# Altium PCB PCB1.pcbdoc
Units mil, origin at the board's own origin, x right, y up, seen from the top; angles counter-clockwise.
Board outline 4640 x 5555.46 mil, 2 copper layers (Top Layer, Bottom Layer); 7 components, 13 nets, 82 pads, 1 vias.
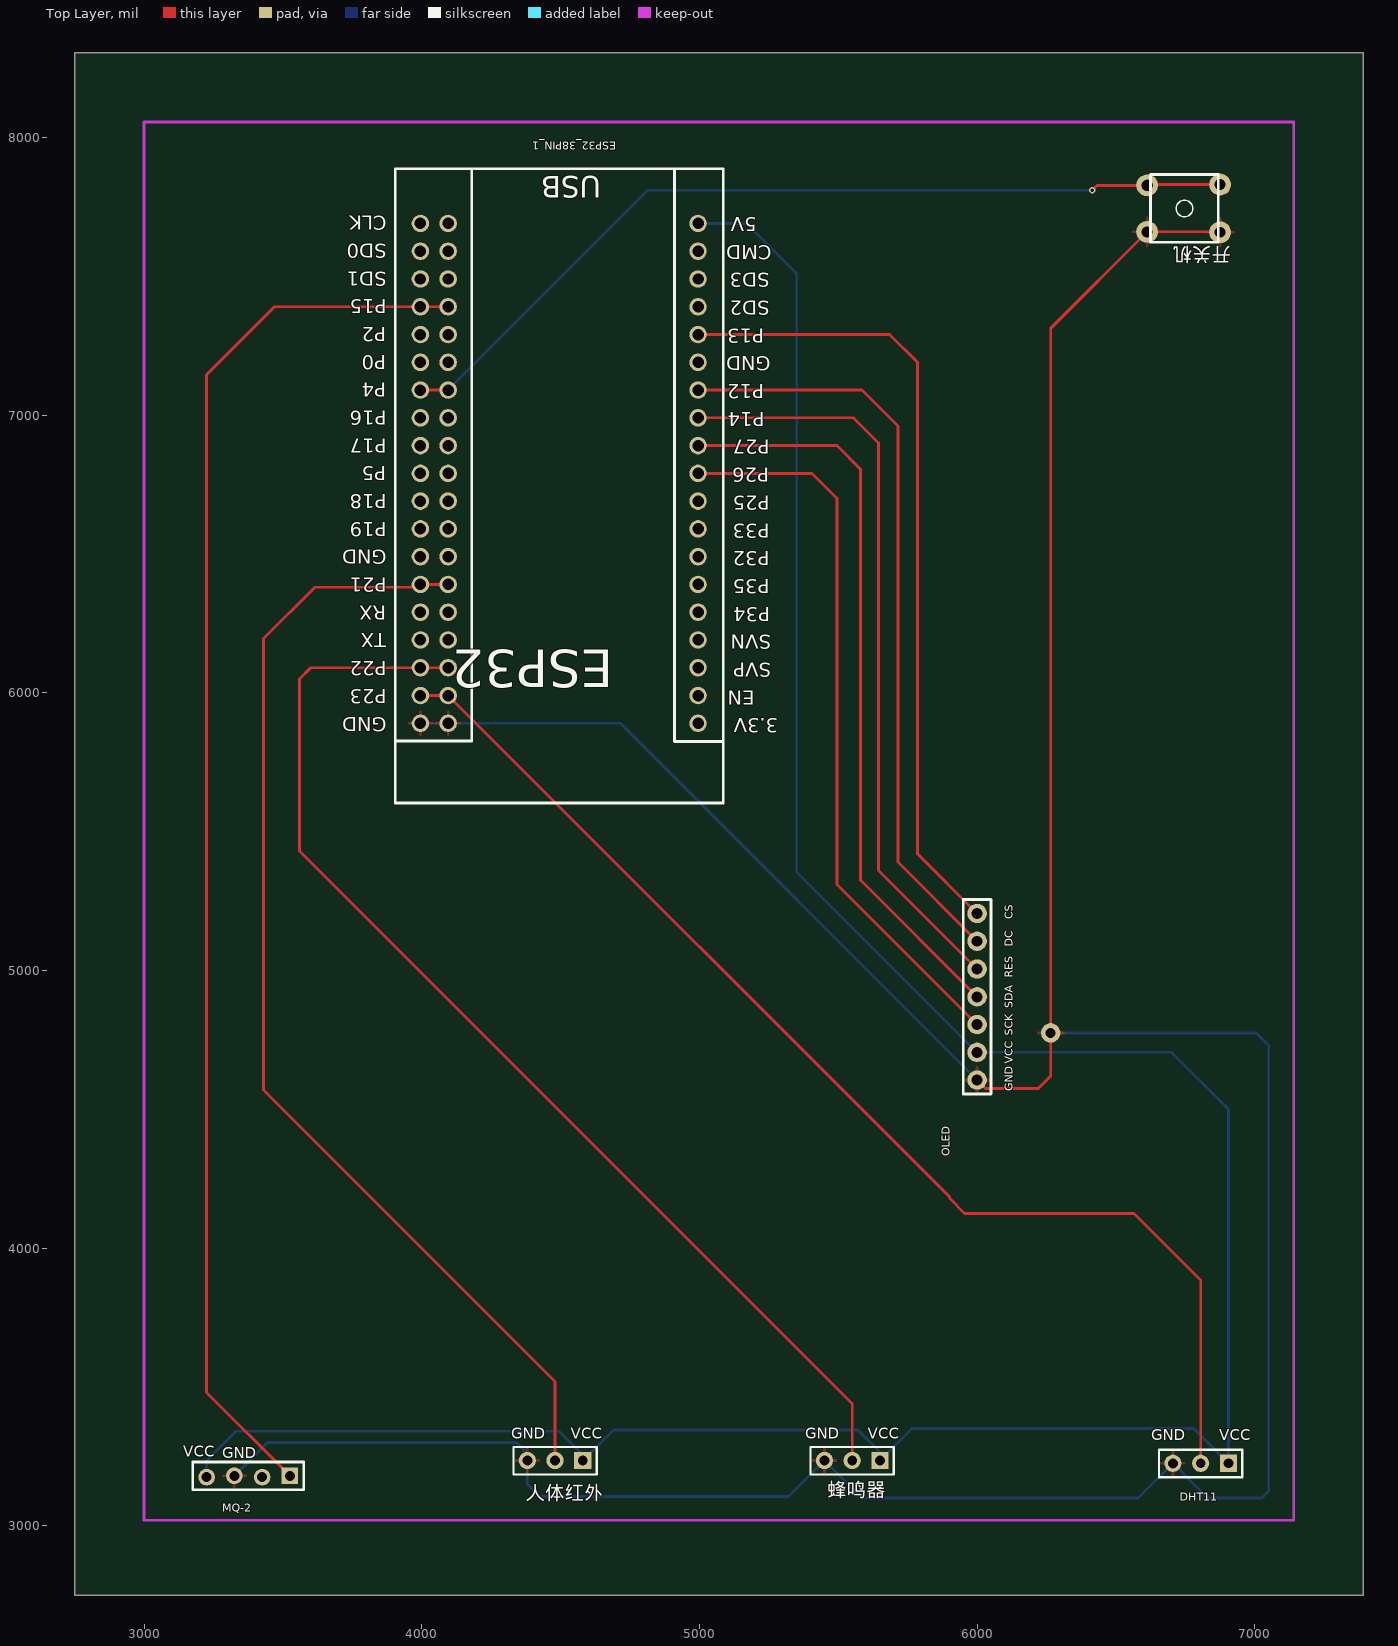
[diagram p0: Top Layer view]
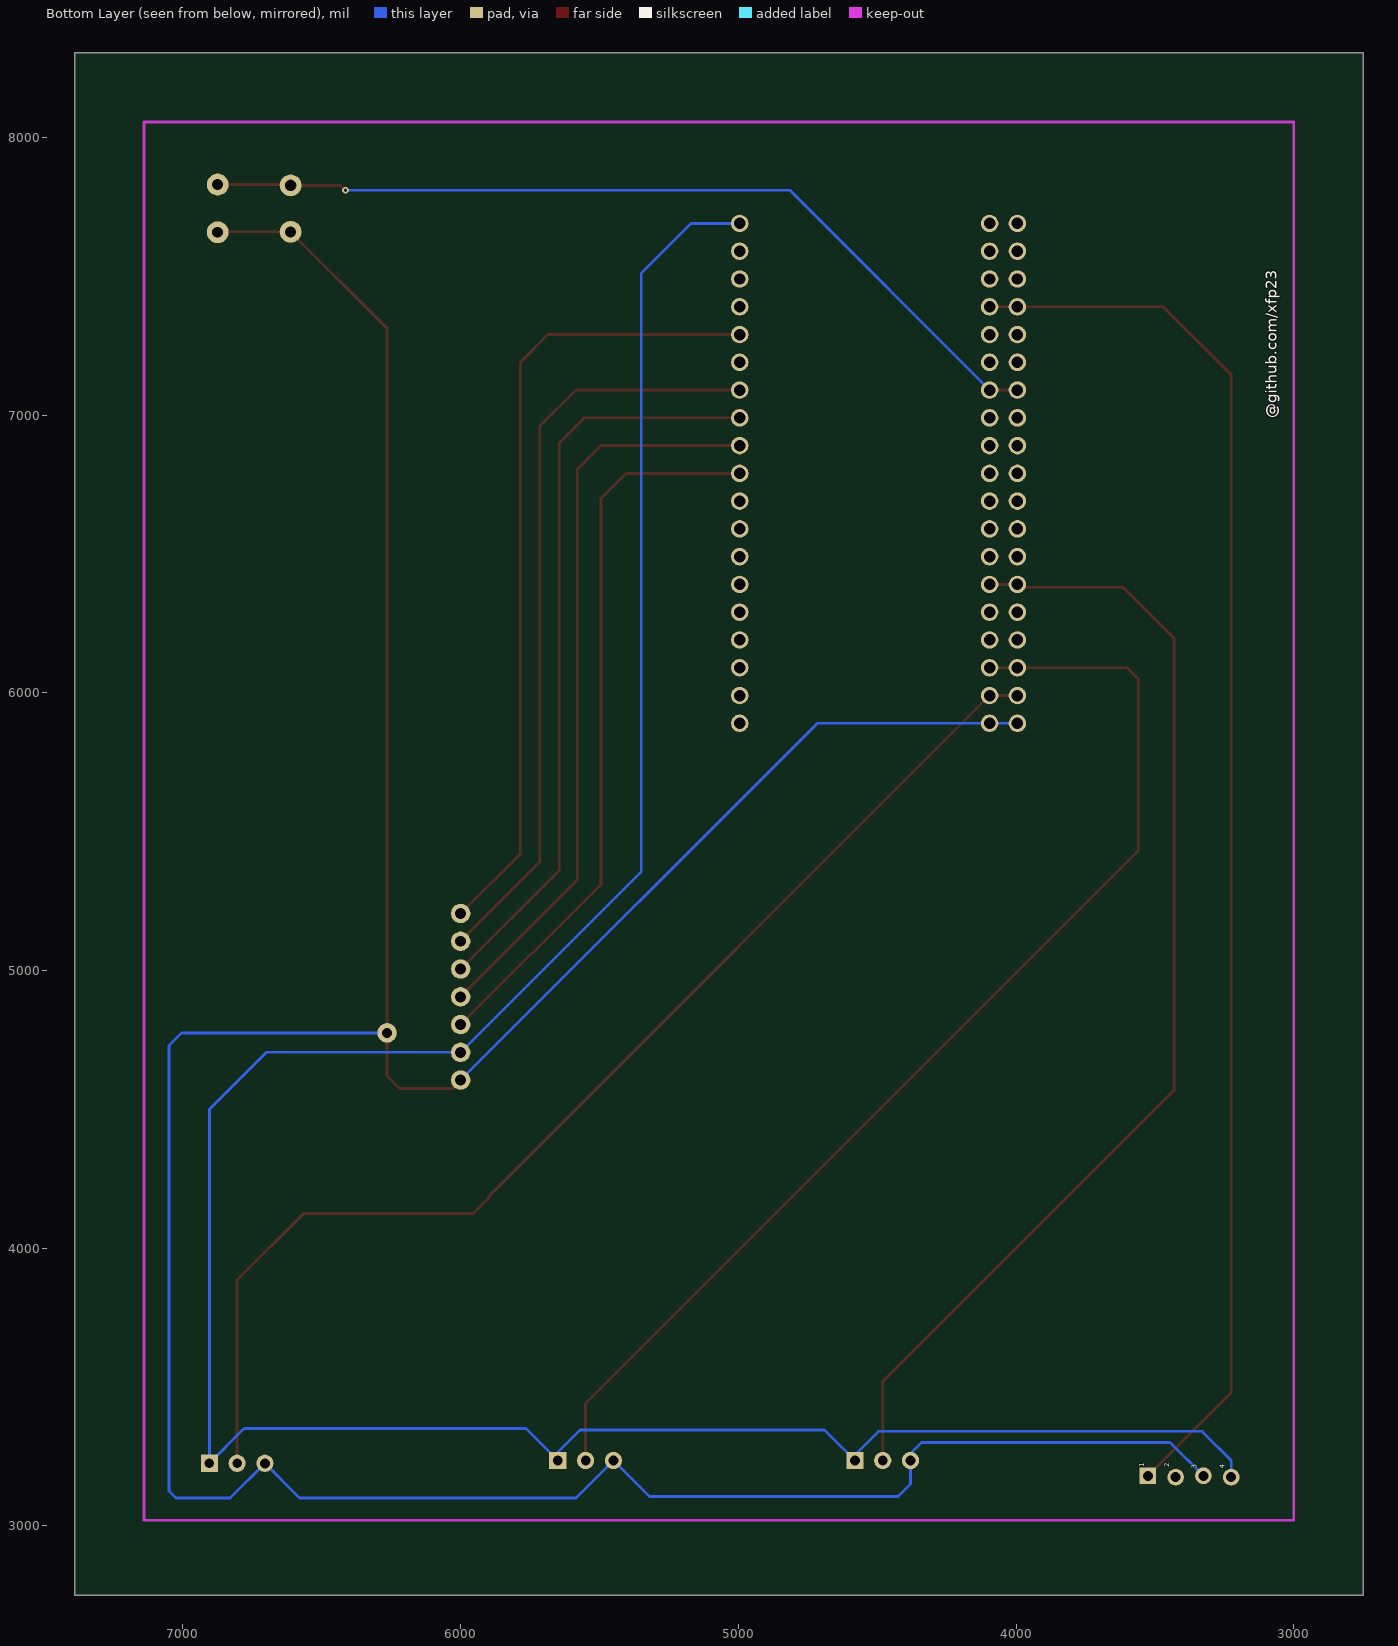
[diagram p1: Bottom Layer view, seen from below]

## Layer stack, top to bottom
Top Layer: signal copper (thickness not stored)
Dielectric: dielectric 12.6, FR-4, Dk 4.8
Bottom Layer: signal copper (thickness not stored)

## Board outline
7390,2750 2750,2750 2750,8305.46 7390,8305.46

## Design rules (kind name [scope] priority, off if disabled: settings)
Clearance copperThickness1oz [All] p1: gap=7 ignorepadtopadclearanceinfootprint=FALSE except(4: Track-Track; 6: Track-SMDPad SMDPad-SMDPad Track-THPad SMDPad-THPad THPad-THPad Track-Via SMDPad-Via THPad-Via Via-Via SMDPad-Fill THPad-Fill Via-Fill Fill-Fill Track-Region SMDPad-Region THPad-Region Via-Region Region-Region Track-Poly SMDPad-Poly THPad-Poly Via-Poly Fill-Poly Region-Poly Poly-Poly Track-Text SMDPad-Text THPad-Text Via-Text Fill-Text Region-Text Poly-Text Text-Text; 6.9: Track-Hole SMDPad-Hole THPad-Hole Via-Hole Fill-Hole Region-Hole Poly-Hole Text-Hole Sheet-Hole; 11.8: Track-Fill Fill-Region Track-Sheet SMDPad-Sheet THPad-Sheet Via-Sheet Fill-Sheet Region-Sheet Poly-Sheet Text-Sheet)
Clearance copperThickness2oz [All] p1: gap=7 ignorepadtopadclearanceinfootprint=FALSE except(6: Track-SMDPad SMDPad-SMDPad Track-THPad SMDPad-THPad THPad-THPad Track-Via SMDPad-Via THPad-Via Via-Via SMDPad-Fill THPad-Fill Via-Fill Fill-Fill Track-Region SMDPad-Region THPad-Region Via-Region Region-Region Track-Poly SMDPad-Poly THPad-Poly Via-Poly Fill-Poly Region-Poly Poly-Poly Track-Text SMDPad-Text THPad-Text Via-Text Fill-Text Region-Text Poly-Text Text-Text; 6.9: Track-Hole SMDPad-Hole THPad-Hole Via-Hole Fill-Hole Region-Hole Poly-Hole Text-Hole Sheet-Hole; 8: Track-Track; 11.8: Track-Fill Fill-Region Track-Sheet SMDPad-Sheet THPad-Sheet Via-Sheet Fill-Sheet Region-Sheet Poly-Sheet Text-Sheet)
DiffPairsRouting differentialPair [All] p1: maxuncoupledlength=10 maxlimit=6 mostfreqgap=6 toplayer_minwidth=5 toplayer_prefwidth=10 toplayer_maxwidth=100 bottomlayer_minwidth=5 bottomlayer_prefwidth=10 bottomlayer_maxwidth=100
PasteMaskExpansion pasteMaskExpansion [All] p1:
PlaneConnect innerPlane [All] p1: planeconnectstyle=Relief reliefexpansion=20 reliefentries=4 reliefconductorwidth=10 reliefairgap=10
PolygonConnect copperRegion [All] p1: connectstyle=Relief reliefentries=4 reliefconductorwidth=10 polygonreliefangle="90 Angle" airgapwidth=10
RoutingVias viaSize [All] p1: viastyle="Through Hole" holewidth=12.0078 minholewidth=11.811 maxholewidth=248.0314 width=24.0158 minwidth=19.685 maxwidth=393.7008
SolderMaskExpansion solderMaskExpansion [All] p1: useseparateexpansions=TRUE expansion=2 expansionbottom=2
Width copperThickness1oz [All] p1: maxlimit=100 minlimit=5 preferedwidth=10
Width copperThickness2oz [All] p1: maxlimit=100 minlimit=8 preferedwidth=10

## Components (designator, comment, footprint, x,y, rotation, side; value= is the part's Value field where it differs from the comment)
DHT11 "DHT11" HDR-F-2.54_1X3 6805,3225.46 r180 top
ESP32_38PIN_1 "ESP32_38PIN" ESP32_38PIN教学 4995,7690.46 r180 top
MQ-2 "排母4pin" 排母4PIN 3575,3230.46 r270 top
OLED "OLED12864_7Pin_SPI" OLED-12864(7PIN-SPI) 6000,4905.46 r90 top
人体红外 "人体红外" HDR-F-2.54_1X3 4480,3235.46 r180 top
开关机 "按键" pb 6745,7745.46 r180 top
蜂鸣器 "蜂鸣器" HDR-F-2.54_1X3 5550,3235.46 r180 top

## Footprints (in the part's own frame and the unit in brackets; to place one, negate y for a bottom-side part, rotate by r counter-clockwise, add the part's x,y. Pads: shape width x height; smd on the part's side, far side on the other; paste and mask are expansions set on the pad)
ESP32_38PIN教学 [mm]
  round 1.6 hole 1.05: 1(0,45.72) 2(0,43.18) 3(0,40.64) 4(0,38.1) 5(0,35.56) 6(0,33.02) 7(0,30.48) 8(0,27.94) 9(0,25.4) 10(0,22.86) 11(0,20.32) 12(0,17.78) 13(0,15.24) 14(0,12.7) 15(0,10.16) 16(0,7.62) 17(0,5.08) 18(0,2.54) 19(0,0) 20(22.86,0) 20(25.4,0) 21(22.86,2.54) 21(25.4,2.54) 22(22.86,5.08) 22(25.4,5.08) 23(22.86,7.62) 23(25.4,7.62) 24(22.86,10.16) 24(25.4,10.16) 25(22.86,12.7) 25(25.4,12.7) 26(22.86,15.24) 26(25.4,15.24) 27(22.86,17.78) 27(25.4,17.78) 28(22.86,20.32) 28(25.4,20.32) 29(22.86,22.86) 29(25.4,22.86) 30(22.86,25.4) 30(25.4,25.4) 31(22.86,27.94) 31(25.4,27.94) 32(22.86,30.48) 32(25.4,30.48) 33(22.86,33.02) 33(25.4,33.02) 34(22.86,35.56) 34(25.4,35.56) 35(22.86,38.1) 35(25.4,38.1) 36(22.86,40.64) 36(25.4,40.64) 37(22.86,43.18) 37(25.4,43.18) 38(22.86,45.72) 38(25.4,45.72)
  silkscreen extent -2.3,-5 27.7,53
HDR-F-2.54_1X3 [mil]
  rect 62x62 hole 35: 1(-100,0)
  round 62 hole 35: 2(0,0)
  round 62 hole 36: 3(100,0)
  silkscreen extent -150,-49 150,50
OLED-12864(7PIN-SPI) [mil]
  round 70 hole 39.4: 1(-300,0) 2(-200,0) 3(-100,0) 4(0,0) 5(100,0) 6(200,0) 7(300,0)
  silkscreen extent -350,-50 350,50
pb [mm]
  round 2 hole 1: 1(-3.302,-2.159) 2(-3.302,2.202) 2(3.371,2.164)
  round 2 hole 1 slot 1.005 at 0 deg: 1(3.371,-2.085)
  silkscreen extent -3.14,-3.07 3.06,3.13
排母4PIN [mil]
  rect 60x60 hole 36: 1(50,-50)
  round 60 hole 36: 2(55,-150) 3(50,-250) 4(54.99,-349.99)
  silkscreen extent 0,-400 100,0

## Free pads (board coordinates)
  round 70 hole 36: 1(6265,4775.46)

## Via types
v1: diameter 24.02, hole 12.01, Top Layer to Bottom Layer, 1 vias

## Nets (pads, with @x,y where several pads share a name; then routed paths per layer and width w, separated by ;. In a path a pad name is that pad's centre, name@x,y a point inside that pad or via, vN(x,y) a via of type N, cw(c..) or ccw(c..) an arc to the next point about the centre after c; other vN are vias at no path point)
5V: DHT11.1 ESP32_38PIN_1.19 MQ-2.4 OLED.2 人体红外.1 蜂鸣器.1 | length 9815.5
  Bottom Layer w10: MQ-2.4 3225,3235.47 3330,3340.46 4495,3340.46 4580,3255.46 人体红外.1 4690,3345.46 5570,3345.46 5650,3265.46 蜂鸣器.1 5765,3350.46 6780,3350.46 DHT11.1 6905,4500.46 6700,4705.46 OLED.2 5350,5355.46 5350,7510.46 5170,7690.46 ESP32_38PIN_1.19
BEEP: ESP32_38PIN_1.36 蜂鸣器.2 | length 4190.9
  Top Layer w10: ESP32_38PIN_1.36@4095,6090.46 3995,6090.46 3600,6090.46 3560,6050.46 3560,5430.46 5550,3440.46 蜂鸣器.2
BODY: ESP32_38PIN_1.33 人体红外.2 | length 4140.7
  Top Layer w10: ESP32_38PIN_1.33@4095,6390.46 3995,6390.46 3985,6380.46 3615,6380.46 3430,6195.46 3430,4570.46 4480,3520.46 人体红外.2
DHT11: DHT11.2 ESP32_38PIN_1.37 | length 4344.8
  Top Layer w10: ESP32_38PIN_1.37@3995,5990.46 4095,5990.46 5900,4185.46 5900,4180.46 5955,4125.46 6565,4125.46 6805,3885.46 DHT11.2
DO: MQ-2.2
GND: DHT11.3 ESP32_38PIN_1.38 MQ-2.3 OLED.1 pad.1 人体红外.3 开关机.2 蜂鸣器.3 | length 12832.5
  Top Layer w10: OLED.1 6030,4575.46 6220,4575.46 6265,4620.46 pad.1 6265,7312.96 6612.3,7660.26 6873.5,7660.26 开关机.2@6875,7658.76
  Bottom Layer w10: MQ-2.3 3445,3300.46 4340,3300.46 4380,3260.46 人体红外.3 4380,3150.46 4425,3105.46 5320,3105.46 蜂鸣器.3 5585,3100.46 6580,3100.46 DHT11.3 6830,3100.46 7025,3100.46 7050,3125.46 7050,4730.46 7005,4775.46 pad.1 ; ESP32_38PIN_1.38@3995,5890.46 4095,5890.46 4715,5890.46 OLED.1
MQ2: ESP32_38PIN_1.23 MQ-2.1 | length 5060.7
  Top Layer w10: MQ-2.1 3225,3480.47 3225,7145.46 3470,7390.46 3995,7390.46 ESP32_38PIN_1.23@4095,7390.46
OLED_CS: ESP32_38PIN_1.15 OLED.7 | length 2905.5
  Top Layer w10: ESP32_38PIN_1.15 5685,7290.46 5785,7190.46 5785,5420.46 OLED.7
OLED_DC: ESP32_38PIN_1.13 OLED.6 | length 2746.9
  Top Layer w10: ESP32_38PIN_1.13 5585,7090.46 5715,6960.46 5715,5390.46 OLED.6
OLED_DI: ESP32_38PIN_1.11 OLED.4 | length 2694.2
  Top Layer w10: ESP32_38PIN_1.11 5495,6890.46 5580,6805.46 5580,5325.46 OLED.4
OLED_DO: ESP32_38PIN_1.10 OLED.3 | length 2641.5
  Top Layer w10: ESP32_38PIN_1.10 5405,6790.46 5495,6700.46 5495,5310.46 OLED.3
OLED_RES: ESP32_38PIN_1.12 OLED.5 | length 2729.3
  Top Layer w10: ESP32_38PIN_1.12 5555,6990.46 5645,6900.46 5645,5360.46 OLED.5
SW1: 
pads on no net: ESP32_38PIN_1.1 ESP32_38PIN_1.2 ESP32_38PIN_1.3 ESP32_38PIN_1.4 ESP32_38PIN_1.5 ESP32_38PIN_1.6 ESP32_38PIN_1.7 ESP32_38PIN_1.8 ESP32_38PIN_1.9 ESP32_38PIN_1.14 ESP32_38PIN_1.16 ESP32_38PIN_1.17 ESP32_38PIN_1.18 ESP32_38PIN_1.20 ESP32_38PIN_1.21 ESP32_38PIN_1.22 ESP32_38PIN_1.24 ESP32_38PIN_1.25 ESP32_38PIN_1.26 ESP32_38PIN_1.27 ESP32_38PIN_1.28 ESP32_38PIN_1.29 ESP32_38PIN_1.30 ESP32_38PIN_1.31 ESP32_38PIN_1.32 ESP32_38PIN_1.34 ESP32_38PIN_1.35 开关机.1
copper on no net: | length 3186.5
  Top Layer w10: 3995,7090.46 4095,7090.46 ; v1(6415,7810.46) 6432.1,7827.56 6612.3,7827.56 6615.2,7830.46 6875,7830.46
  Bottom Layer w10: 4095,7090.46 4815,7810.46 v1(6415,7810.46)

## Polygon pours and split planes (outlines as drawn)
GND on Top Layer (solid, remove dead copper): 3000,3000 7140,3000 7140,8037.2 3000,8037.2

## Keep-outs
Board Outline Layer:
  lines w10: 3000,3020.46 7140,3020.46 7140,8055.46 3000,8055.46 3000,3020.46

## Silkscreen, mask and mechanical layers (free items; w line width, h text height)
Top Silkscreen Layer:
  text "ESP32" at 4689.17,6155.38 h135.94 r180
  text "GND" at 4321.68,3313.78 h38.94
  text "VCC" at 4536.68,3313.78 h38.94
  text "GND" at 5381.68,3313.78 h38.94
  text "VCC" at 5606.68,3313.78 h38.94
  text "GND" at 6626.68,3308.78 h38.94
  text "VCC" at 6871.68,3308.78 h38.94
  text "VCC" at 3141.68,3248.78 h38.94
  text "GND" at 3281.68,3243.78 h38.94
Bottom Silkscreen Layer:
  text "@github.com/xfp23" at 3061.68,6988.2 h38.94 r270

## Text inside footprints (layer, text, board x,y; h text height)
ESP32_38PIN_1: Top Silkscreen Layer "USB" at 4646.16,7860.67 h77.88 r180; Top Silkscreen Layer "3.3V" at 5283.23,5907.98 h51.1 r180; Top Silkscreen Layer "EN" at 5199.54,6008.26 h51.1 r180; Top Silkscreen Layer "SVP" at 5257.99,6108.54 h51.1 r180; Top Silkscreen Layer "SVN" at 5257.99,6208.82 h51.1 r180; Top Silkscreen Layer "P34" at 5255.79,6309.09 h51.1 r180; Top Silkscreen Layer "P35" at 5253.59,6409.37 h51.1 r180; Top Silkscreen Layer "P32" at 5253.59,6509.65 h51.1 r180; Top Silkscreen Layer "P33" at 5253.59,6609.93 h51.1 r180; Top Silkscreen Layer "P25" at 5253.59,6710.2 h51.1 r180; Top Silkscreen Layer "P26" at 5251.29,6810.48 h51.1 r180; Top Silkscreen Layer "P27" at 5253.59,6910.76 h51.1 r180; Top Silkscreen Layer "P14" at 5235.89,7011.04 h51.1 r180; Top Silkscreen Layer "P12" at 5233.69,7111.32 h51.1 r180; Top Silkscreen Layer "GND" at 5255.89,7211.59 h51.1 r180; Top Silkscreen Layer "P13" at 5233.69,7311.87 h51.1 r180; Top Silkscreen Layer "SD2" at 5253.59,7412.15 h51.1 r180; Top Silkscreen Layer "SD3" at 5253.59,7512.43 h51.1 r180; Top Silkscreen Layer "CMD" at 5260.29,7612.7 h51.1 r180; Top Silkscreen Layer "5V" at 5206.14,7712.98 h51.1 r180; Top Silkscreen Layer "GND" at 3874.36,5912.98 h51.1 r180; Top Silkscreen Layer "P23" at 3874.36,6013.26 h51.1 r180; Top Silkscreen Layer "P22" at 3874.36,6113.54 h51.1 r180; Top Silkscreen Layer "TX" at 3872.12,6213.82 h51.1 r180; Top Silkscreen Layer "RX" at 3872.12,6314.09 h51.1 r180; Top Silkscreen Layer "P21" at 3874.36,6414.37 h51.1 r180; Top Silkscreen Layer "GND" at 3874.36,6514.65 h51.1 r180; Top Silkscreen Layer "P19" at 3874.36,6614.93 h51.1 r180; Top Silkscreen Layer "P18" at 3874.36,6715.2 h51.1 r180; Top Silkscreen Layer "P5" at 3872.12,6815.48 h51.1 r180; Top Silkscreen Layer "P17" at 3874.36,6915.76 h51.1 r180; Top Silkscreen Layer "P16" at 3874.36,7016.04 h51.1 r180; Top Silkscreen Layer "P4" at 3872.12,7116.32 h51.1 r180; Top Silkscreen Layer "P0" at 3872.12,7216.59 h51.1 r180; Top Silkscreen Layer "P2" at 3872.12,7316.87 h51.1 r180; Top Silkscreen Layer "P15" at 3874.36,7417.15 h51.1 r180; Top Silkscreen Layer "SD1" at 3874.36,7517.43 h51.1 r180; Top Silkscreen Layer "SD0" at 3874.36,7617.7 h51.1 r180; Top Silkscreen Layer "CLK" at 3874.36,7717.98 h51.1 r180
MQ-2: Bottom Silkscreen Layer "1" at 3538.86,3210.46 h18.69 r270; Bottom Silkscreen Layer "2" at 3448.86,3210.46 h18.69 r270; Bottom Silkscreen Layer "3" at 3348.86,3205.46 h18.69 r270; Bottom Silkscreen Layer "4" at 3248.86,3205.46 h18.69 r270
OLED: Top Silkscreen Layer "DC" at 6128.32,5084.99 h28.71 r90; Top Silkscreen Layer "RES" at 6128.38,4974.69 h28.71 r90; Top Silkscreen Layer "SDA" at 6128.38,4864.69 h28.71 r90; Top Silkscreen Layer "VCC" at 6128.38,4664.69 h28.71 r90; Top Silkscreen Layer "SCK" at 6128.38,4764.69 h28.71 r90; Top Silkscreen Layer "GND" at 6128.38,4564.69 h28.71 r90; Top Silkscreen Layer "CS" at 6128.38,5185.04 h28.71 r90